# EAGLE board lipo-charger-SMD (EAGLE 6.1)
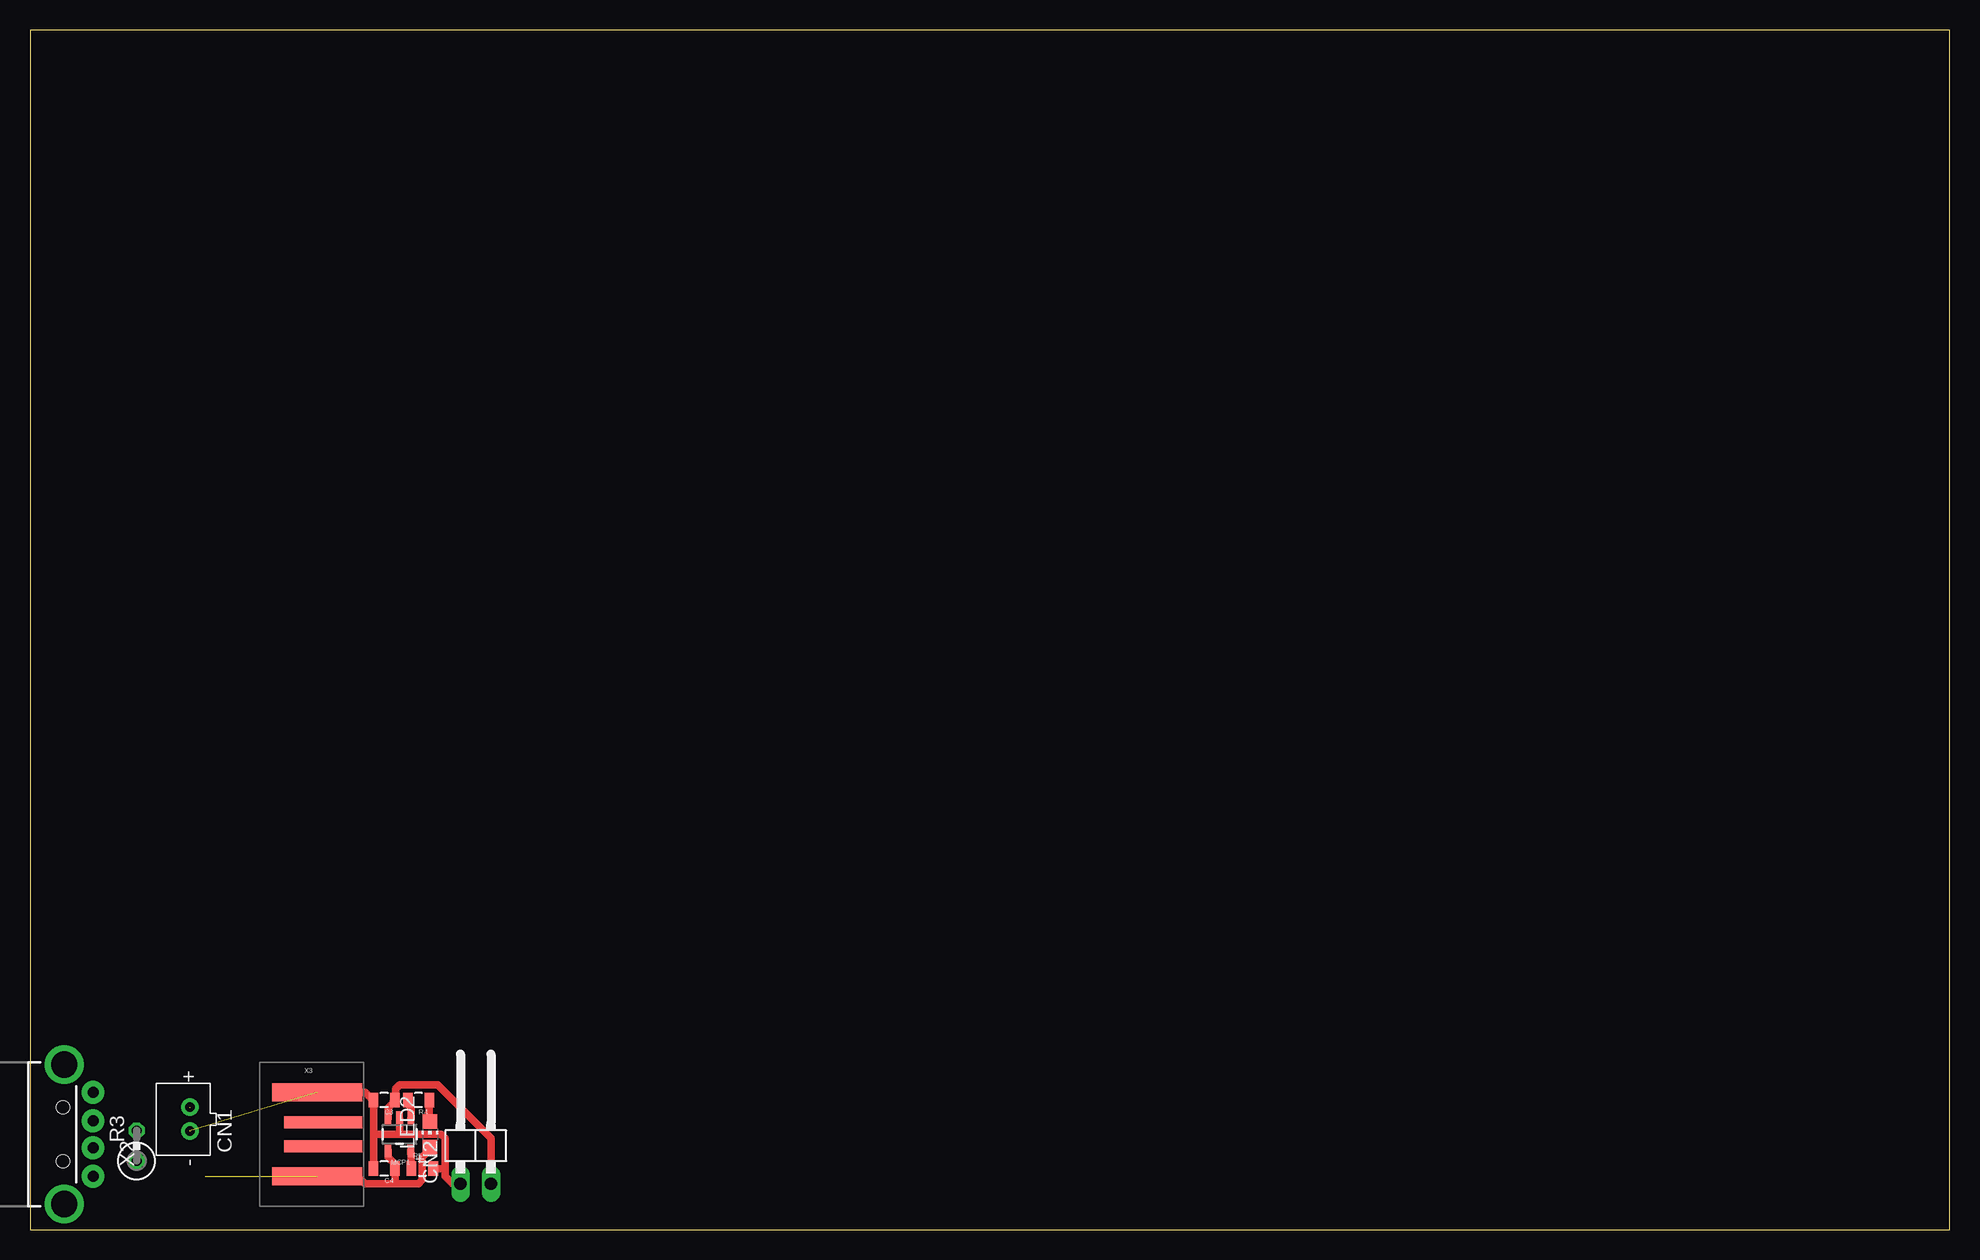
[diagram p0: board, top side]
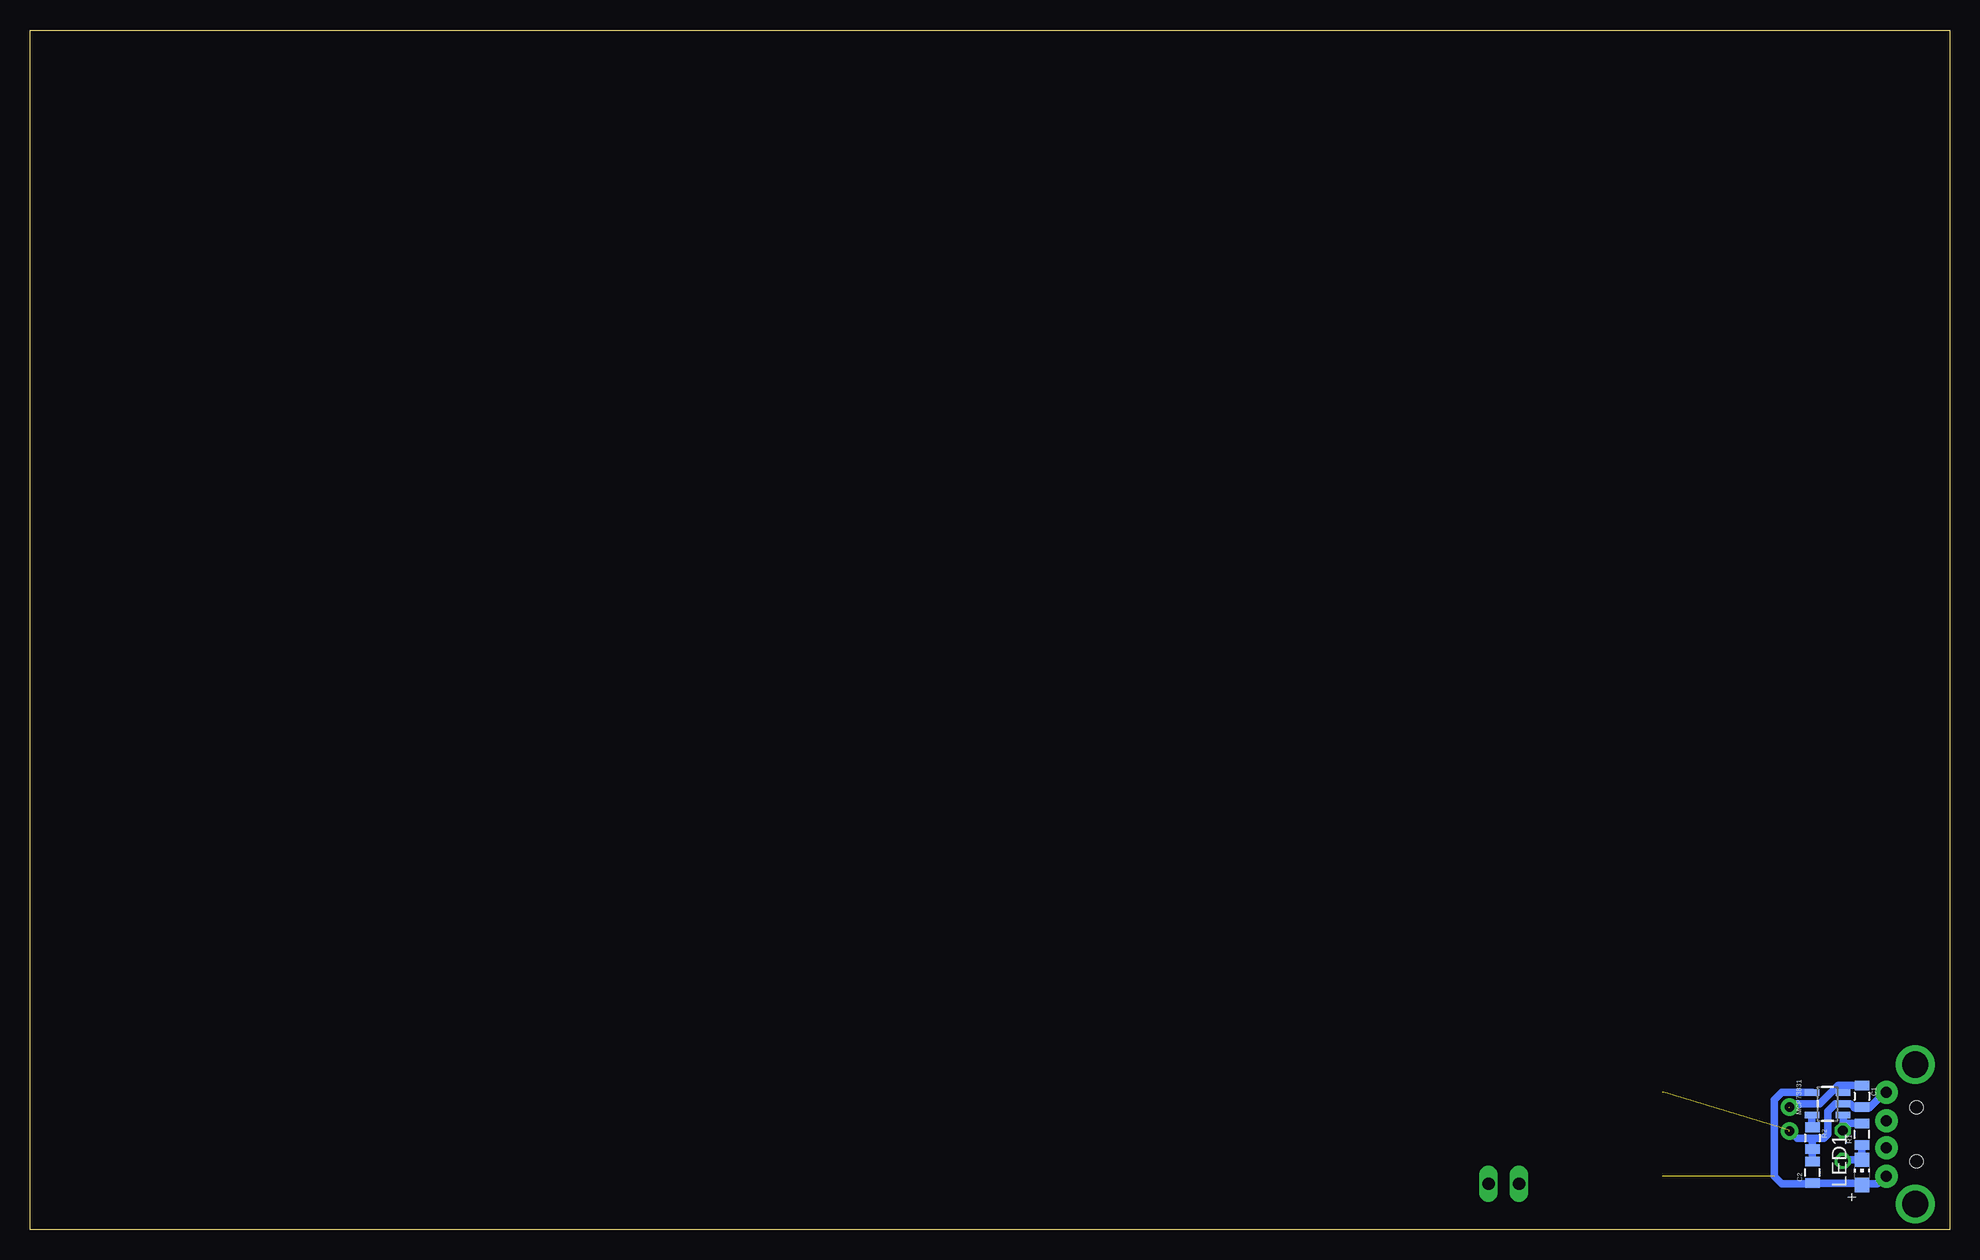
[diagram p1: board, bottom side, seen from below]

Size 160 x 100 mm. Coordinates in mm from the lower left corner, seen from the top.
Outline: 0,0 160,0 160,100 0,100 0,0
Copper layers (1*16): Top 0.035mm / dielectric 1.5mm / Bottom 0.035mm
Design rules: minimum track width 10mil, minimum drill 24mil, track to track 8mil, track to pad 8mil, pad to pad 8mil, via to via 8mil, smd to smd 8mil, copper to edge 40mil, drill to drill 8mil, minimum pad ring 10mil, minimum via ring 8mil, stop-mask expansion 4mil, vias tented up to drill 0mil, thermal gap 10mil

## Footprints (pad centres in the part's own frame; a part is rotated, then mirrored left to right if it is on the bottom)
0805 = smd 0.8 x 1.2: 1 -0.9,0; 2 0.9,0
JST-PH-2-THM = drill 0.8 pad 1.422: 1 1,0; 2 -1,0
1X02/90 = drill 1.016 long: 1 -1.27,-3.81; 2 1.27,-3.81
CHIP-LED0805 = smd 1.2 x 1.2: A 0,-1.05; C 0,1.05
SOT23-5 = smd 0.55 x 1.2: 1 -0.95,-1.3; 2 0,-1.3; 3 0.95,-1.3; 4 0.95,1.3; 5 -0.95,1.3
0309V = drill 0.813 octagon: 1 -1.27,0; 2 1.27,0
USB-A-H = drill 0.914 pad 1.88: D+ 2.4,1.127; D- 2.4,-1.127; GND 2.4,3.5; VBUS 2.4,-3.5 | drill 2.2: GND2 0,-5.8; GND3 0,5.8 | hole 1.1: -0.1,2.25; -0.1,-2.25
USB-A-PCB = smd 7.5 x 1.5: 5V -0.2,-3.5; GND -0.2,3.5 | smd 6.5 x 1: USB_M 0.3,-1; USB_P 0.3,1

## Placement (x,y rotation side)
C1  4.7uF  [0805]  7.3,11.11 270 bottom
C2  4.7uF  [0805]  11.43,4.76 90 bottom
C3  4.7uF  [0805]  29.53,10.79 180 top
C4  4.7uF  [0805]  29.53,5.08 180 top
CN1  [JST-PH-2-THM]  13.34,9.21 90 top
CN2  [1X02/90]  37.15,7.62 0 top
LED1  [CHIP-LED0805]  7.3,4.76 0 bottom
LED2  [CHIP-LED0805]  33.34,7.94 0 top
MCP1  [SOT23-5]  30.8,7.94 180 top
MCP73831  [SOT23-5]  10.16,10.48 90 bottom
R1  470ohm  [0805]  7.3,7.94 90 bottom
R2  2k ohm  [0805]  11.43,7.62 270 bottom
R3  470ohm  [0309V]  8.89,6.99 90 top
R4  470ohm  [0805]  32.38,10.79 180 top
R5  2k ohm  [0805]  32.7,5.08 0 top
X2  USB-A-H  [USB-A-H]  2.86,7.94 0 top
X3  USBPCB  [USB-A-PCB]  24.13,7.94 0 top

## Library data of the parts
C1-C4 MCP1 MCP73831 R1 R2 R4 R5 X2 X3 = SparkFun
CN1 LED1 LED2 = adafruit
CN2 = pinhead
R3 = rcl

## Nets
GND: C1.2 C2.2 C3.2 C4.2 CN1.2 CN2.1 MCP1.2 MCP73831.2 R2.2 R5.2 X2.GND X3.GND
N$1: MCP73831.5 R2.1
N$2: MCP1.5 R5.1
N$3: C1.1 CN1.1 MCP73831.3
N$4: LED1.C R1.1 R3.1
N$5: MCP73831.1 R1.2 R3.2
N$6: C3.1 CN2.2 MCP1.3
N$7: LED2.C R4.1
N$8: MCP1.1 R4.2
VCC: C2.1 C4.1 LED1.A LED2.A MCP1.4 MCP73831.4 X2.VBUS X3.5V

## Tracks (layer width: path | path; a pad name or v marks a point on that pad's centre or on a via)
GND  (3 unrouted)
  Top 0.61: 28.63,7.94 C4.2 | 28.63,7.94 C3.2 28.57,10.79 27.94,11.43 23.81,11.43 | 28.63,7.94 30.8,7.94 | 30.8,7.94 MCP1.2 | 30.8,7.94 34.29,7.94 34.61,7.62 34.61,5.08 | R5.2 34.61,5.08 | 34.61,5.08 34.61,4.45 35.24,3.81 CN2.1
  Bottom 0.61: C1.2 7.99,10.21 | 7.99,10.21 8.26,10.48 MCP73831.2 9.53,10.48 10.16,9.84 10.16,7.94 10.48,7.62 11.43,7.62 | 7.99,10.21 7.94,10.16 6.67,10.16 5.39,11.44 X2.GND | 11.43,7.62 12.7,7.62 13.34,8.26 | C2.2 R2.2 11.43,7.62
N$1
  Bottom 0.61: MCP73831.5 11.46,8.55 R2.1
N$2
  Top 0.61: MCP1.5 31.75,6.35 31.75,5.13 R5.1
N$3  (1 unrouted)
  Bottom 0.61: C1.1 9.26,12.01 | 9.26,12.01 10.79,10.48 13.02,10.48 13.34,10.16 | 9.26,12.01 9.26,11.83 MCP73831.3
N$4
  Bottom 0.61: R1.1 LED1.C 8.79,5.81 R3.1
N$5
  Bottom 0.61: R1.2 8.86,8.84 | R3.2 8.89,8.84 8.86,8.84 | 8.86,8.84 MCP73831.1
N$6
  Top 0.61: C3.1 30.43,10.74 29.84,10.16 MCP1.3 29.85,10.16 30.48,10.79 30.48,11.75 30.8,12.06 33.97,12.06 38.42,7.62 CN2.2
N$7
  Top 0.61: R4.1 33.28,9.04 LED2.C
N$8
  Top 0.61: R4.2 31.48,10.43 31.75,10.16 MCP1.1
VCC  (1 unrouted)
  Top 0.61: X3.5V 27,4.44 27.3,4.13 27.62,4.13 27.94,3.81 30.48,3.81 | MCP1.4 29.84,6.03 30.43,5.45 C4.1 30.43,3.86 30.48,3.81 | 30.48,3.81 32.38,3.81 32.7,4.13 32.7,6.03 33.34,6.67 LED2.A
  Bottom 0.61: MCP73831.4 13.97,11.43 14.61,10.79 14.61,4.45 13.97,3.81 11.48,3.81 C2.1 7.67,3.86 7.3,3.49 LED1.A 7.3,3.81 6.03,3.81 5.4,4.45 X2.VBUS